# Altium PCB BeetleMeterV1.PcbDoc
Units mm, origin at the board's own origin, x right, y up, seen from the top; angles counter-clockwise.
Board outline 26 x 24 mm, 2 copper layers (Top Layer, Bottom Layer); 18 components, 11 nets, 46 pads, 6 vias.
Unrouted connection lines stored in the file: 3.
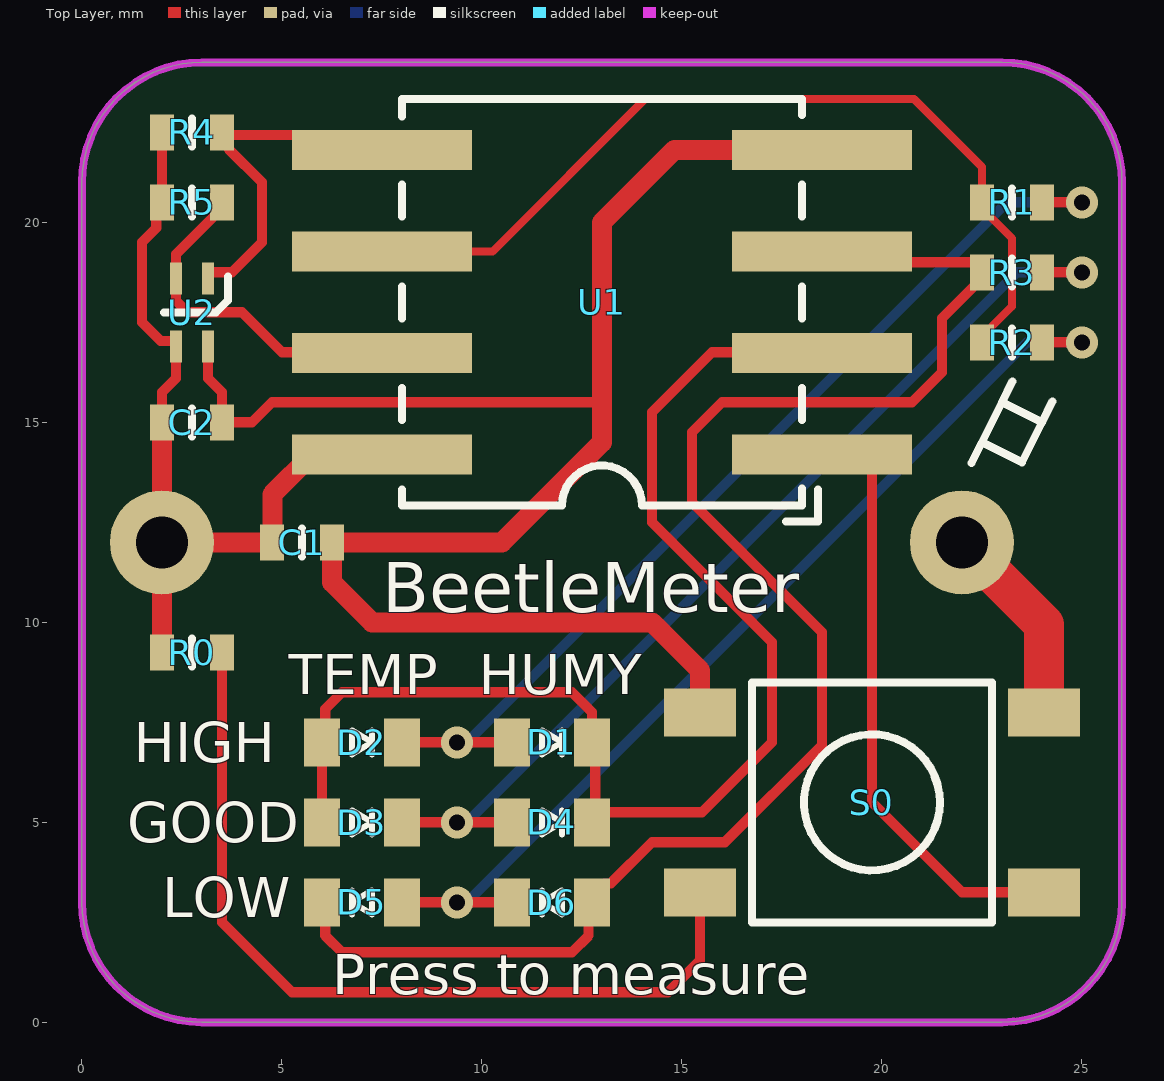
[diagram p0: Top Layer view]
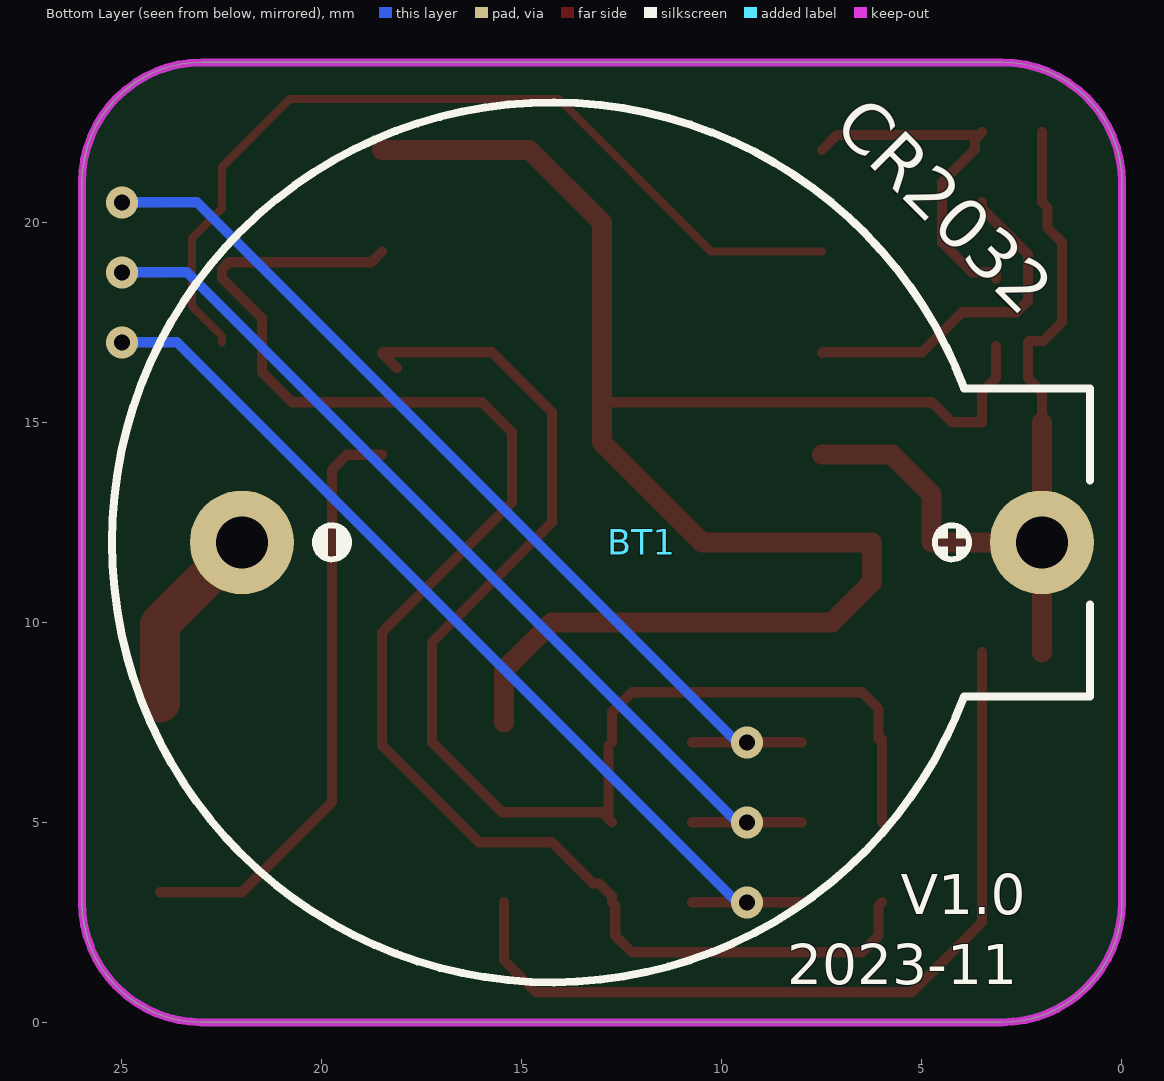
[diagram p1: Bottom Layer view, seen from below]
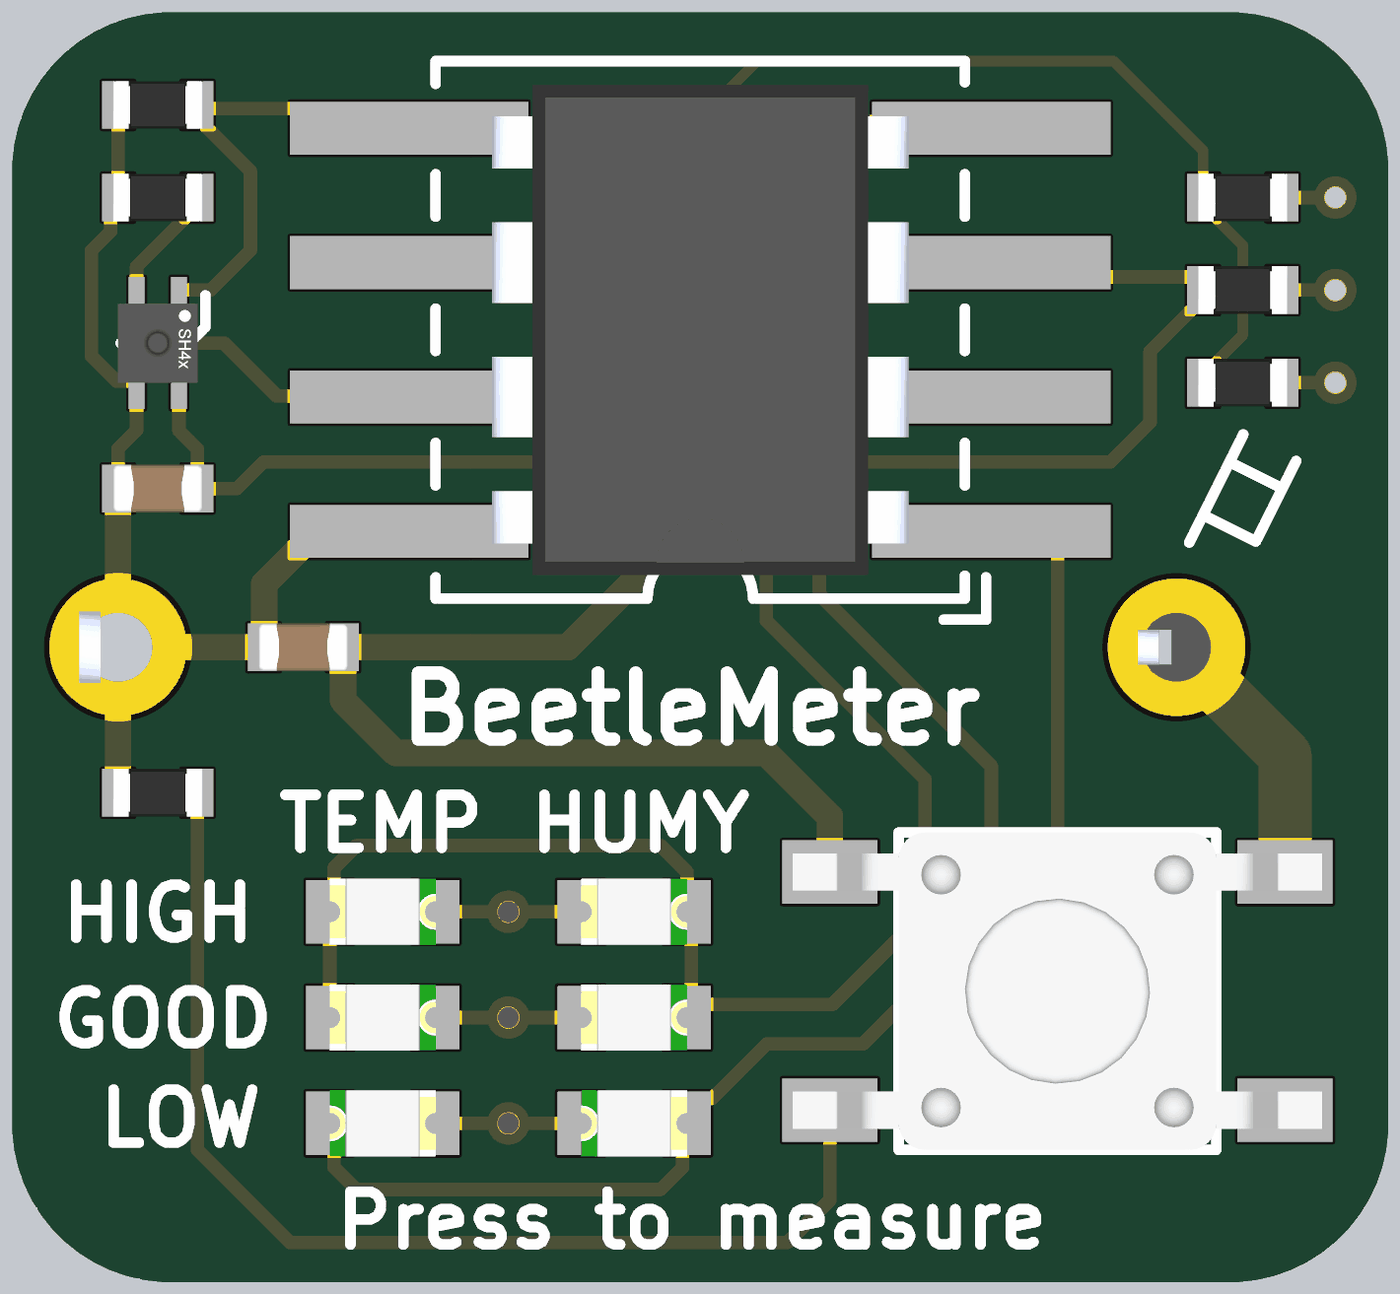
[diagram p2: 3D render of the assembled board from above, using the file's embedded part models]

## Layer stack, top to bottom
Top Solder: solder mask 0.0102, Solder Resist, Dk 3.5
Top Layer: signal copper 0.0356
Dielectric 1: dielectric 0.32, FR-4, Dk 4.8
Bottom Layer: signal copper 0.0356
Bottom Solder: solder mask 0.0102, Solder Resist, Dk 3.5

## Board outline
0,3 ccw(c3,3) 3,0 23,0 ccw(c23,3) 26,3 26,21 ccw(c23,21) 23,24 3,24 ccw(c3,21) 0,21

## Design rules (kind name [scope] priority, off if disabled: settings)
Clearance [All] p1: gap=0.254 ignorepadtopadclearanceinfootprint=FALSE except(0: Arc-Hole Track-Hole SMDPad-Hole THPad-Hole Via-Hole Fill-Hole Poly-Hole Region-Hole Text-Hole)
PolygonConnect [All] p1: connectstyle=Direct reliefconductorwidth=0.254 reliefentries=4 polygonreliefangle="90 Angle" airgapwidth=0.254
RoutingVias [All] p1: holewidth=0.711 width=1.27 viastyle="Through Hole" minholewidth=0.711 minwidth=1.27 maxholewidth=0.711 maxwidth=1.27
SilkToSilkClearance [All] p1: silktosilkclearance=0.15
SilkToSolderMaskClearance [IsPad] p1: minsilkscreentomaskgap=0.15 clearancetoexposedcopper=TRUE
SolderMaskExpansion [All] p1: expansion=0.102 istentingtop=FALSE
Width [All] p1: maxlimit=1 minlimit=0.2 preferedwidth=0.254
28 further rules are at their usual default settings.

## Components (designator, comment, footprint, x,y, rotation, side; value= is the part's Value field where it differs from the comment)
BT1 "CR2032" CR2032-TH 14,12 r270 bottom locked
C1 "Capacitor" 0603C 5.5,12 r180 top value=1u
C2 "Capacitor" 0603C 2.75,15 r0 top value=100n
D1 "R" 0805D 11.75,7 r0 top
D2 "R" 0805D 7,7 r0 top
D3 "R" 0805D 7,5 r0 top
D4 "R" 0805D 11.75,5 r0 top
D5 "R" 0805D 7,3 r180 top
D6 "R" 0805D 11.75,3 r180 top
R0 "Resistor" 0603R 2.75,9.25 r180 top value=10K
R1 "Resistor" 0603R 23.25,20.5 r180 top value=100R
R2 "Resistor" 0603R 23.25,17 r180 top value=100R
R3 "Resistor" 0603R 23.25,18.75 r0 top value=100R
R4 "Resistor" 0603R 2.75,22.25 r180 top value=10K
R5 "Resistor" 0603R 2.75,20.5 r180 top value=10K
S0 "" SW_6*6 19.75,5.5 r180 top
U1 "ATtiny13A-5" "DIP-8 - SMD" 13,18 r90 top
U2 "SHT40" DFN-4-EP(1.5x1.5) 2.75,17.75 r270 top

## Footprints (in the part's own frame and the unit in brackets; to place one, negate y for a bottom-side part, rotate by r counter-clockwise, add the part's x,y. Pads: shape width x height; smd on the part's side, far side on the other; paste and mask are expansions set on the pad)
0603C [mm] "0603/1608 SMD general footprint"
  rect 0.6x0.9 smd mask+0.05: 1(-0.75,0) 2(0.75,0)
  silkscreen extent 0,-0.35 0,0.35, body extent -0.85,-0.45 0.85,0.45, height 0.9
0603R [mm] "0603/1608 SMD general footprint"
  rect 0.6x0.9 smd mask+0.05: 1(-0.75,0) 2(0.75,0)
  silkscreen extent 0,-0.35 0,0.35, body extent -0.85,-0.45 0.85,0.45, height 0.55
0805D [mm] "0603/1608 SMD LED general footprint"
  rect 0.9x1.2 smd mask+0.05: 1(-1,0) 2(1,0)
  silkscreen extent -0.25,-0.3 0.25,0.3, body extent -1,-0.63 1,0.63, height 0.7
CR2032-TH [mm]
  round 2.6 hole 1.3: 1(0,12) 2(0,-8)
  silkscreen extent -11,-11.25 11,13.2, body extent -11.17,-11.17 11.17,13.23, height 9
DFN-4-EP(1.5x1.5) [mm]
  rect 0.8x0.3 smd mask+0.05: 1(-0.85,0.4) 2(-0.85,-0.4) 3(0.85,-0.4) 4(0.85,0.4)
  silkscreen extent -0.9,-0.7 0,0.9, body extent -0.75,-0.75 0.75,0.75, height 0.56
"DIP-8 - SMD" [mm] "through hole DIP-8 2.54mm"
  rect 1x4.5 smd mask+0.05: 1(-3.81,-5.5) 2(-1.27,-5.5) 3(1.27,-5.5) 4(3.81,-5.5) 5(3.81,5.5) 6(1.27,5.5) 7(-1.27,5.5) 8(-3.81,5.5)
  silkscreen extent -5.48,-5.4 5.08,5, body extent -4.64,-3.94 4.64,3.94, height 9.48
SW_6*6 [mm]
  rect 1.8x1.2 smd mask+0.05: 1(-4.3,2.25) 1(4.3,2.25) 2(-4.3,-2.25) 2(4.3,-2.25)
  silkscreen extent -3,-3 3,3, body extent -5,-3 5,3, height 4.42

## Part data
BT1: library part "Battery 3V", "Coin cell battery 3V"
C1: "Capacitor 1uF"
C2: "Capacitor 100nF ±10% 50V", Component=CL05B104KB54PNC
D1 D2 D3 D4 D5 D6: library part LED, "General LED symbol"
R0 R4 R5: "Resistor 10kΩ ±1% 1/16W", Component=0402WGF1002TCE
  R0 R4: Function="SDA pull-up"
  R5: Function="SCL pull-up"
R1 R2 R3: library part RES, "Resistor 100Ω"
S0: library part Switch-2, "2-positions switch open-closed"
U1: "tiny AVR 8-pin microcontroller"
U2: "SHT40 temperature and humidity sensor", Component=SHT40-AD1B-R2, Function="T&H sensor"

## Via types
v1: diameter 0.8, hole 0.4, Top Layer to Bottom Layer, tented both sides, 6 vias

## Nets (pads, with @x,y where several pads share a name; then routed paths per layer and width w, separated by ;. In a path a pad name is that pad's centre, name@x,y a point inside that pad or via, vN(x,y) a via of type N, cw(c..) or ccw(c..) an arc to the next point about the centre after c; other vN are vias at no path point)
GND: BT1.2 C1.1 C2.2 S0.2 U1.4 U2.4 | length 48.8
  Top Layer w0.254: U2.4 3.15,16.1 3.5,15.75 C2.2 4.25,15 4.75,15.5 12.979,15.5 13,15.479
  Top Layer w0.5: S0.2@15.45,7.5 15.45,8.8 14.25,10 7.25,10 6.25,11 C1.1 10.5,12 13,14.5 13,15.479 13,20 14.81,21.81 U1.4
  Top Layer w1: BT1.2 22,11.64 22.36,11.64 24.05,9.95 S0.2@24.05,8
HIGH: D1.1 D2.2 R1.1 | length 25.1
  Top Layer w0.254: D2.2 v1(9.375,7) D1.1 ; R1.1 v1(25,20.5)
  Bottom Layer w0.254: v1@9.375,6.75 23.125,20.5 v1(25,20.5)
LOW: D5.1 D6.2 R2.1 | length 25.3
  Top Layer w0.254: D5.1 v1(9.375,3) D6.2 ; R2.1 v1(25,17)
  Bottom Layer w0.254: v1@9.375,2.75 23.625,17 v1(25,17)
MID: D3.2 D4.1 R3.2 | length 25.2
  Top Layer w0.254: D3.2 v1(9.375,5) D4.1 ; R3.2 v1(25,18.75)
  Bottom Layer w0.254: v1@9.375,4.75 23.375,18.75 v1(25,18.75)
PB1: R1.2 R2.2 U1.6 | length 22.3
  Top Layer w0.2: U1.6 10.27,19.27 14.08,23.08 20.803,23.08 22.5,21.383 R1.2 22.5,20.35 23.25,19.6 23.25,17.9 22.5,17.15 R2.2
PB3: D1.2 D2.1 D3.1 D4.2 U1.2 | length 33.2
  Top Layer w0.254: D3.1 D2.1@6,7.082 ; D2.1 6.082,7.082 6.082,7.832 6.5,8.25 12.25,8.25 12.75,7.75 D1.2 ; D1.2@12.832,6.918 D4.2@12.832,5.082 ; U1.2@18.127,16.357 U1.2 18.48,16.75 15.75,16.75 14.25,15.25 14.25,12.5 17.25,9.5 17.25,7 15.5,5.25 D4.2@13,5.25 ; D4.2@12.832,5.082 D4.2@13,5.25 ; D4.2@12.832,5.082 D4.2 D4.2@13,5.25
PB4: D5.2 D6.1 R3.1 U1.3 | length 39.3
  Top Layer w0.254: D5.2 6.082,2.918 6.082,2.168 6.5,1.75 12.25,1.75 12.668,2.168 12.668,2.918 D6.1 12.75,3.15 13.073,3.473 13.223,3.473 14.25,4.5 16.072,4.5 18.5,6.928 18.5,9.75 15.25,13 15.25,14.75 16,15.5 20.75,15.5 21.5,16.25 21.5,17.6 22.5,18.6 22.5,18.827 22.327,19 18.77,19 U1.3
RST: R0.1 S0.1 U1.1 | length 36.2
  Top Layer w0.254: R0.1 3.5,2.5 5.25,0.75 14.65,0.75 15.45,1.55 S0.1@15.45,3 ; U1.1 19.377,14.19 19.75,13.817 19.75,5.5 22,3.25 S0.1@24.05,3.25
SCL: R5.1 U1.7 U2.2 | length 8.6
  Top Layer w0.254: R5.1 3.5,20.35 2.35,19.2 2.35,18.036 2.636,17.75 4,17.75 5,16.75 7.48,16.75 U1.7
SDA: R4.1 U1.5 U2.1 | length 9
  Top Layer w0.254: U2.1 3.15,18.727 3.173,18.75 3.75,18.75 4.5,19.5 4.5,21 3.673,21.827 3.673,22.077 R4.1 ; R4.1@3.66,22.183 7.127,22.183 U1.5
VCC: BT1.1 C1.2 C2.1 R0.2 R4.2 R5.2 U1.8 U2.3 | length 21
  Top Layer w0.254: C2.1 2,15.75 2.35,16.1 2.35,17.009 2.327,17.032 1.968,17.032 1.5,17.5 1.5,19.5 1.86,19.86 1.86,20.36 R5.2 R4.2
  Top Layer w0.5: R0.2 BT1.1 ; C2.1 BT1.1 ; U1.8 5.75,14.19 4.76,13.2 4.76,12.01 C1.2 BT1.1

## Keep-outs
Keep-Out Layer:
  the board outline again, w0.2

## Silkscreen, mask and mechanical layers (free items; w line width, h text height)
Top Overlay:
  lines w0.2: 22.24,13.98 22.5,14.5 ; 23.26,16.02 23,15.5 ; 24.26,15.52 24,15 ; 22.5,14.5 23,15.5 ; 22.5,14.5 23.5,14 24,15 ; 23,15.5 24,15
  text "BeetleMeter" at 7.502,10.25 h1.25
  text "TEMP" at 5.167,8.2 h1
  text "HUMY" at 9.917,8.2 h1
  text "HIGH" at 1.301,6.5 h1
  text "GOOD" at 1.135,4.5 h1
  text "LOW" at 2.009,2.625 h1
  text "Press to measure" at 6.252,0.7 h1
Bottom Overlay:
  text "CR2032" at 7.257,22.361 h1.25 r45
  text "V1.0" at 5.532,2.7 h1
  text "2023-11" at 8.365,0.95 h1